# Altium PCB Copy of PSU.PcbDoc
Units mm, origin at the board's own origin, x right, y up, seen from the top; angles counter-clockwise.
Board outline 113.66 x 105.41 mm, 2 copper layers (Top Layer, Bottom Layer); 32 components, 15 nets, 78 pads, 40 vias.
Unrouted connection lines stored in the file: 3.
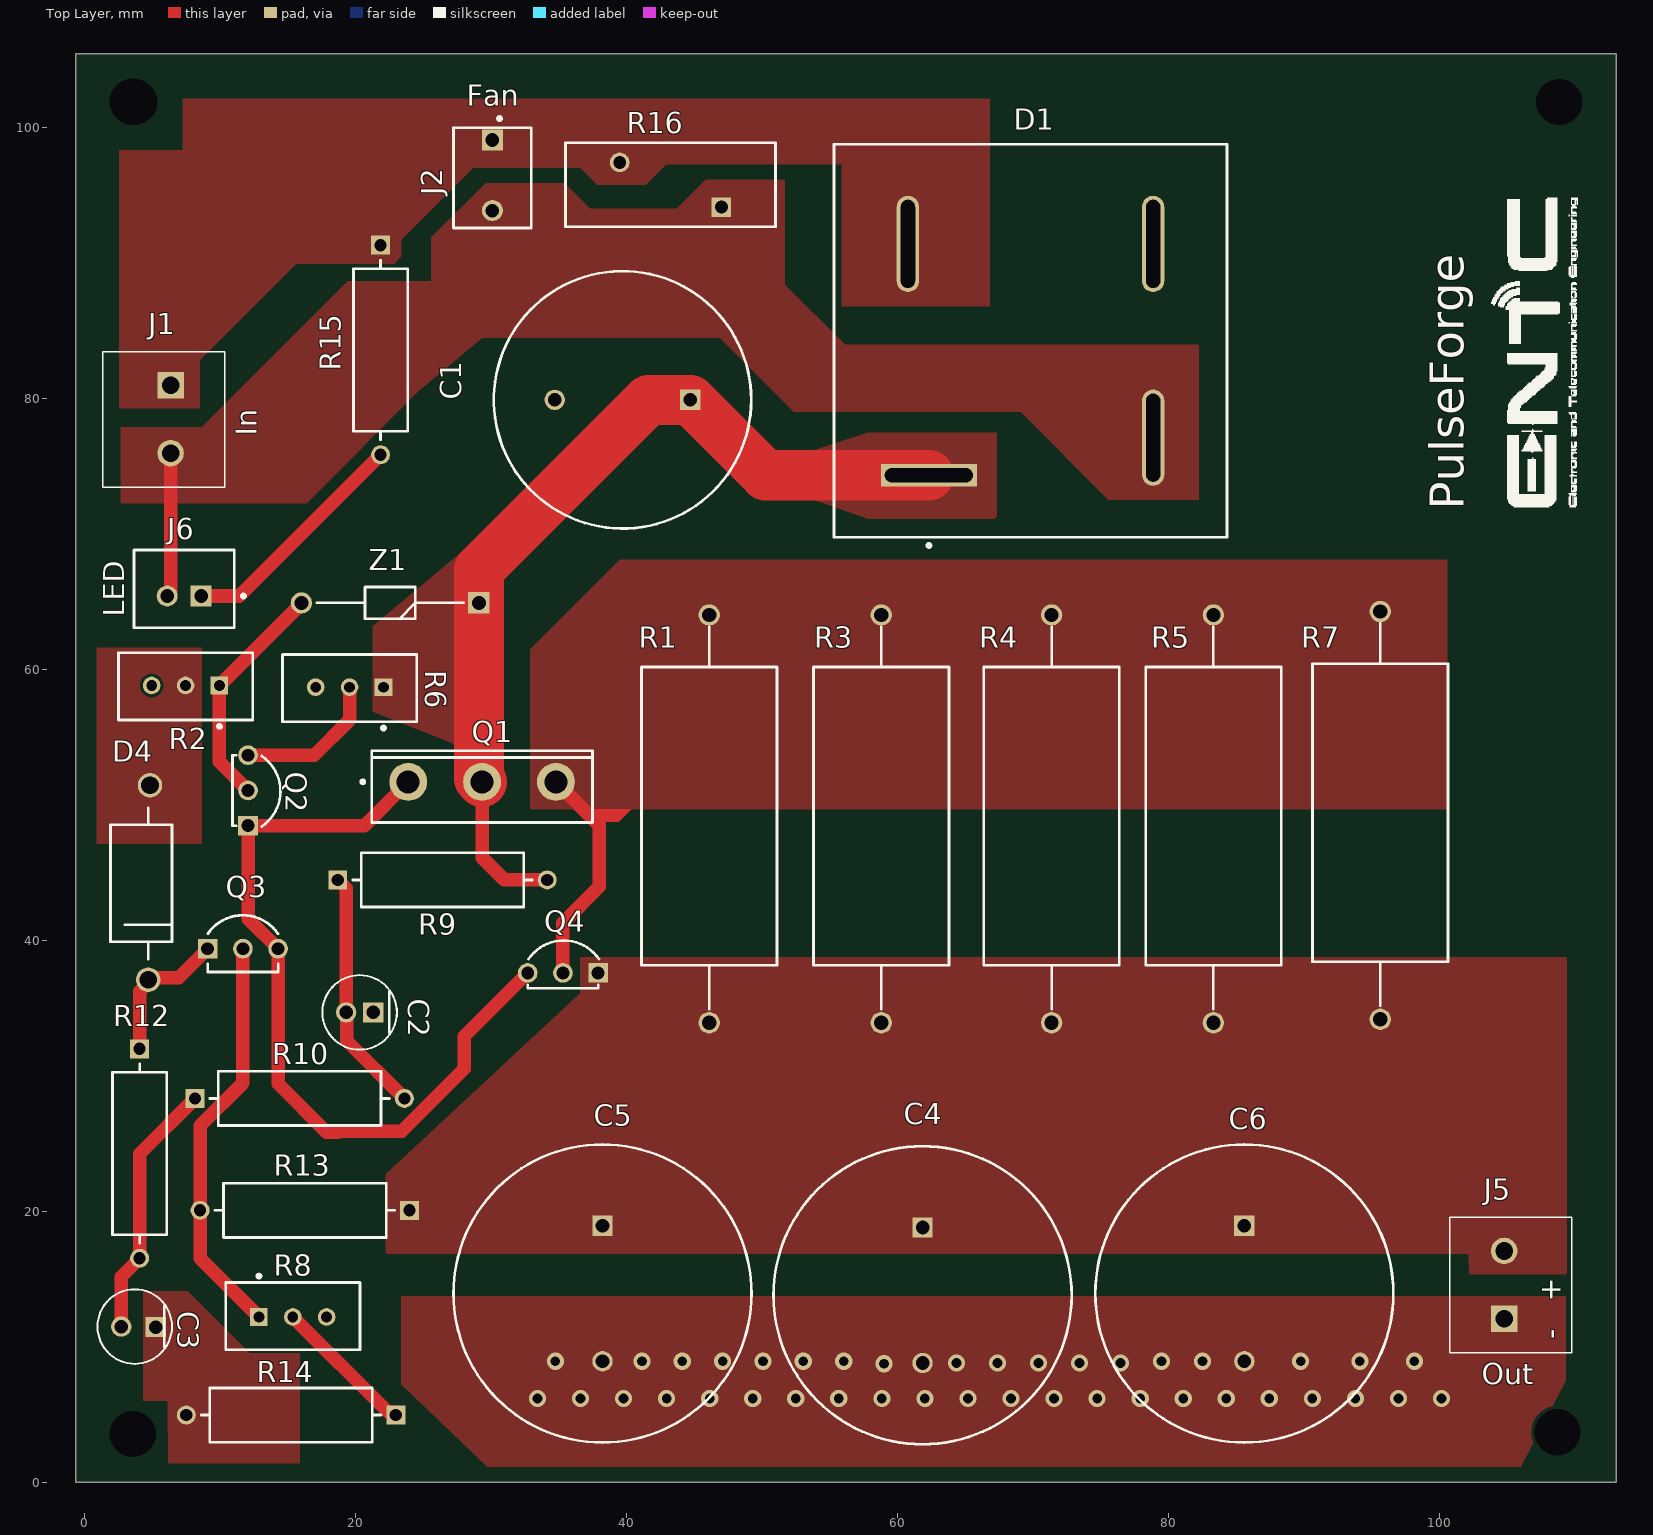
[diagram p0: Top Layer view]
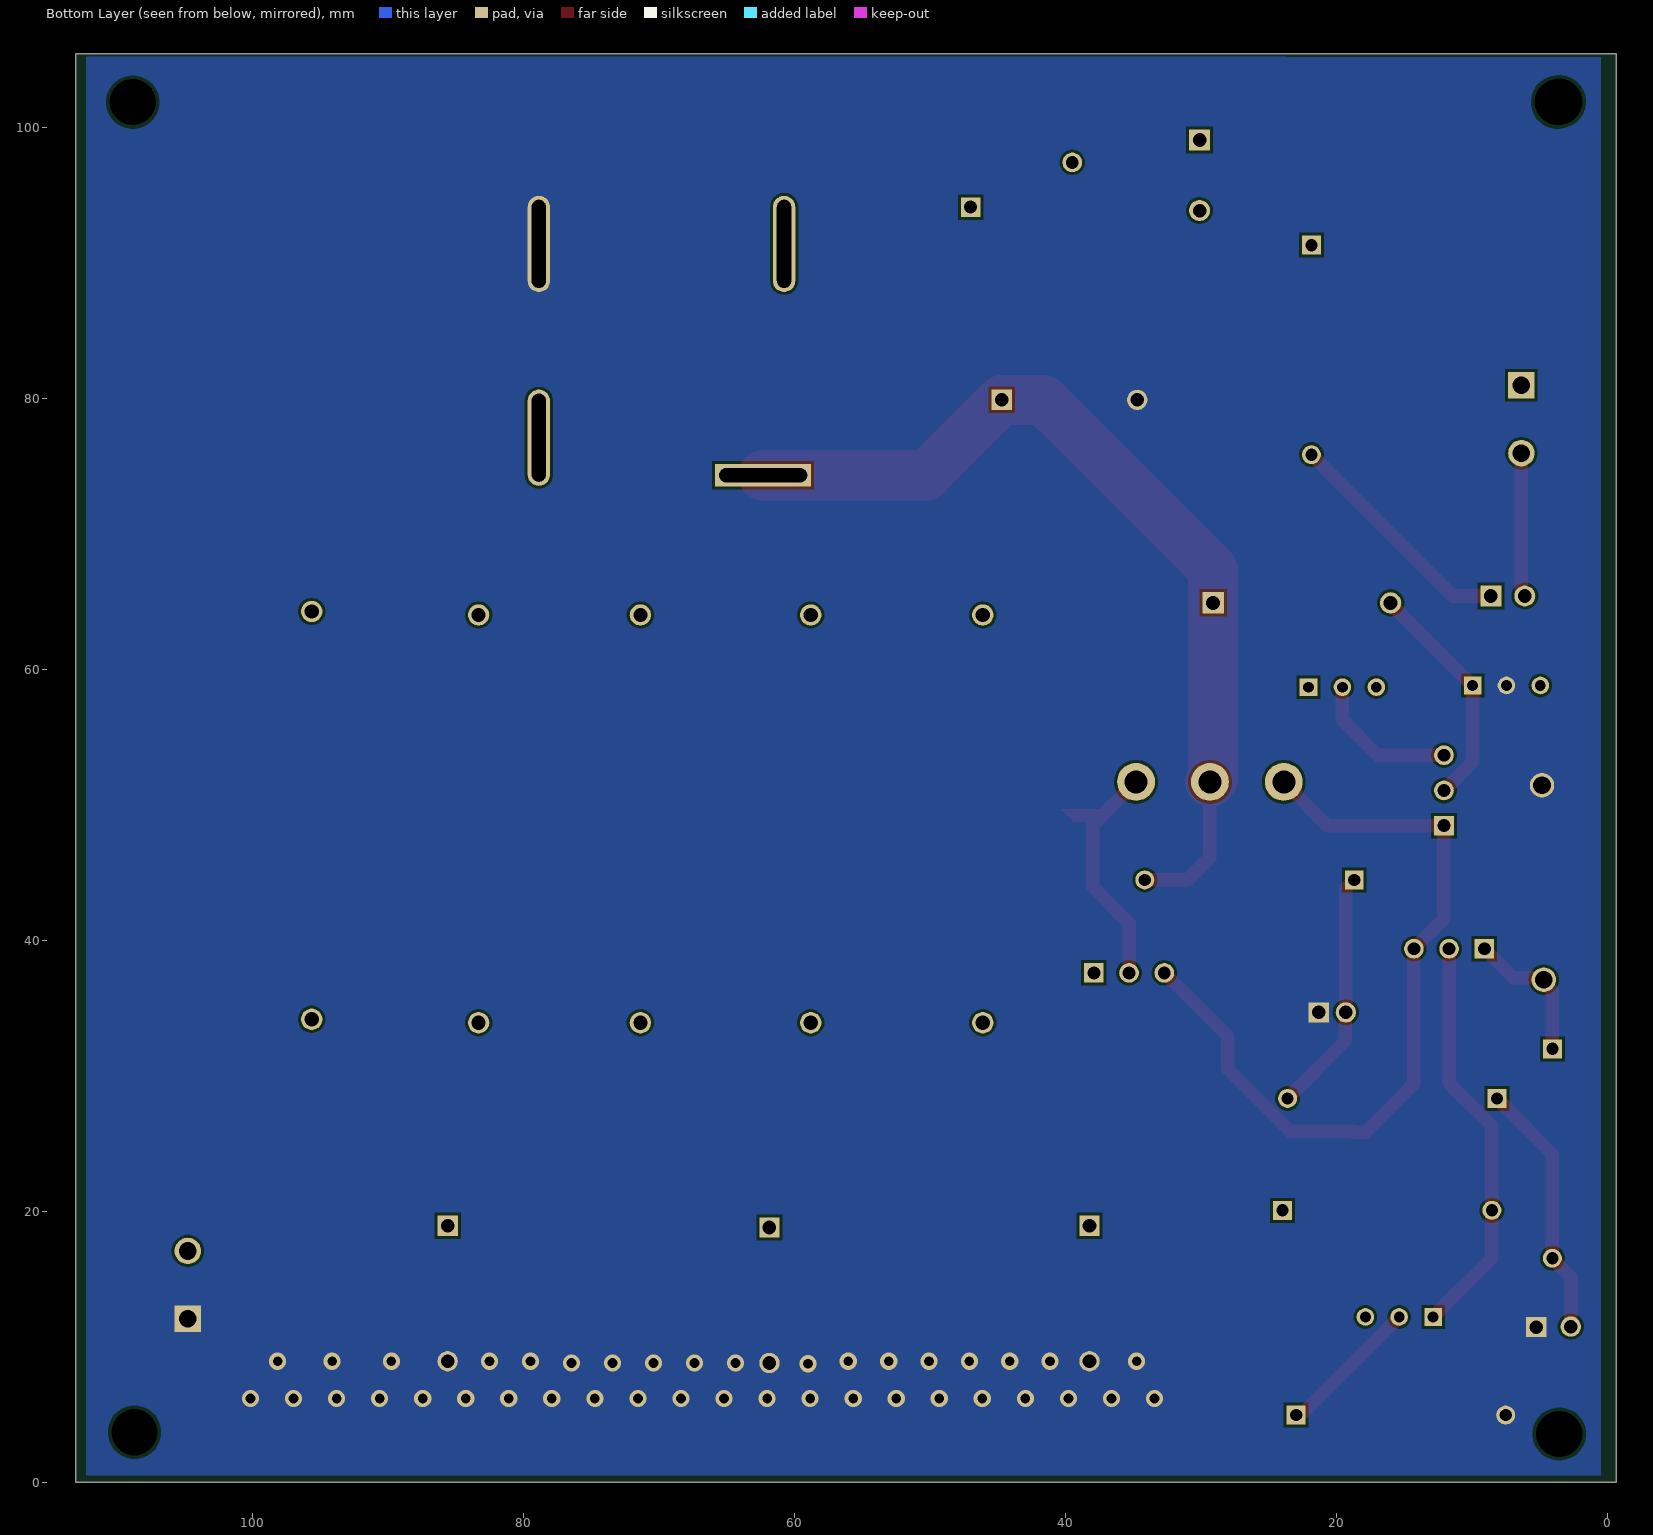
[diagram p1: Bottom Layer view, seen from below]

## Layer stack, top to bottom
Top Solder: solder mask 0.0102, Solder Resist, Dk 3.5
Top Layer: signal copper 0.07
Dielectric 1: dielectric 0.32, FR-4, Dk 4.8
Bottom Layer: signal copper 0.07
Bottom Solder: solder mask 0.0102, Solder Resist, Dk 3.5

## Board outline
-0.635,0 113.03,0 113.03,105.41 -0.635,105.41

## Design rules (kind name [scope] priority, off if disabled: settings)
BoardOutlineClearance [All] p1: gap=0.2 ignorepadtopadclearanceinfootprint=FALSE
Clearance [All] p1: gap=0.203 ignorepadtopadclearanceinfootprint=FALSE except(0.25: Arc-Hole Track-Hole SMDPad-Hole THPad-Hole Via-Hole Fill-Hole Poly-Hole Region-Hole Text-Hole)
ComponentClearance [All] p1: gap=0.127 collisioncheckmode=3 verticalgap=0.127 showdistances=TRUE
DiffPairsRouting [All] p1: maxlimit=0.381 minlimit=0.203 mostfreqgap=0.203 toplayer_minwidth=0.203 toplayer_maxwidth=25.4 toplayer_prefwidth=0.203 bottomlayer_minwidth=0.203 bottomlayer_maxwidth=25.4 bottomlayer_prefwidth=0.203 maxuncoupledlength=12.7
Height [All] p1: minheight=0 maxheight=1816.048 prefheight=12.7
HoleSize [All] p1: absolutevalues=TRUE maxlimit=6.3 minlimit=0.3 maxpercent=80.000 minpercent=20.000
HoleToHoleClearance [All] p1: gap=0.25 allowstackedmicrovias=FALSE
MinimumAnnularRing [All] p1: minimumring=0.076
MinimumSolderMaskSliver [All] p1: minsoldermaskwidth=0
PlaneClearance [All] p1: clearance=0.203
PlaneConnect PlaneConnectPowerPads [InPadClass('PowerPads')] p1: planeconnectstyle=Direct reliefexpansion=0.508 reliefentries=4 reliefconductorwidth=0.254 reliefairgap=0.254
PlaneConnect [All] p2: pad.planeconnectstyle=Relief pad.reliefexpansion=0.3 pad.reliefentries=4 pad.reliefconductorwidth=0.203 pad.reliefairgap=0.203 via.planeconnectstyle=Direct via.reliefexpansion=0.3 via.reliefentries=4 via.reliefconductorwidth=0.127 via.reliefairgap=0.127
PolygonConnect PolygonConnect_12 [All vs IsNamedPolygon('GND_L02_P001')] p1: connectstyle=Direct reliefconductorwidth=0.254 reliefentries=4 polygonreliefangle="90 Angle" airgapwidth=0.254
PolygonConnect PolygonConnect_11 [All vs IsNamedPolygon('GND_L02_P001')] p2: thpad.connectstyle=Relief thpad.reliefconductorwidth=0.254 thpad.reliefentries=4 thpad.polygonreliefangle="90 Angle" thpad.airgapwidth=0.254 smdpad.connectstyle=Relief smdpad.reliefconductorwidth=0.254 smdpad.reliefentries=4 smdpad.polygonreliefangle="90 Angle" smdpad.airgapwidth=0.254 via.connectstyle=Direct via.reliefconductorwidth=0.254 via.reliefentries=4 via.polygonreliefangle="90 Angle" via.airgapwidth=0.254
PolygonConnect PolygonConnect_10 [All vs IsNamedPolygon('GND_L02_P001')] p3: thpad.connectstyle=Direct thpad.reliefconductorwidth=0.254 thpad.reliefentries=4 thpad.polygonreliefangle="90 Angle" thpad.airgapwidth=0.254 smdpad.connectstyle=Direct smdpad.reliefconductorwidth=0.254 smdpad.reliefentries=4 smdpad.polygonreliefangle="90 Angle" smdpad.airgapwidth=0.254 via.connectstyle=Relief via.reliefconductorwidth=0.254 via.reliefentries=4 via.polygonreliefangle="90 Angle" via.airgapwidth=0.254
PolygonConnect PolygonConnect_9 [All vs IsNamedPolygon('GND_L02_P001')] p4: thpad.connectstyle=Direct thpad.reliefconductorwidth=0.254 thpad.reliefentries=4 thpad.polygonreliefangle="90 Angle" thpad.airgapwidth=0.254 smdpad.connectstyle=Direct smdpad.reliefconductorwidth=0.254 smdpad.reliefentries=4 smdpad.polygonreliefangle="90 Angle" smdpad.airgapwidth=0.254 via.connectstyle=Relief via.reliefconductorwidth=0.254 via.reliefentries=4 via.polygonreliefangle="90 Angle" via.airgapwidth=0.254
PolygonConnect PolygonConnect_8 [All vs IsNamedPolygon('GND_L02_P001')] p5: thpad.connectstyle=Direct thpad.reliefconductorwidth=0.254 thpad.reliefentries=4 thpad.polygonreliefangle="90 Angle" thpad.airgapwidth=0.254 smdpad.connectstyle=Direct smdpad.reliefconductorwidth=0.254 smdpad.reliefentries=4 smdpad.polygonreliefangle="90 Angle" smdpad.airgapwidth=0.254 via.connectstyle=Relief via.reliefconductorwidth=0.254 via.reliefentries=4 via.polygonreliefangle="90 Angle" via.airgapwidth=0.254
PolygonConnect PolygonConnect_7 [All vs IsNamedPolygon('NONET_L-01_P-001')] p6: thpad.connectstyle=Direct thpad.reliefconductorwidth=0.254 thpad.reliefentries=4 thpad.polygonreliefangle="90 Angle" thpad.airgapwidth=0.254 smdpad.connectstyle=Direct smdpad.reliefconductorwidth=0.254 smdpad.reliefentries=4 smdpad.polygonreliefangle="90 Angle" smdpad.airgapwidth=0.254 via.connectstyle=Relief via.reliefconductorwidth=0.254 via.reliefentries=4 via.polygonreliefangle="90 Angle" via.airgapwidth=0.254
PolygonConnect PolygonConnect_6 [All vs IsNamedPolygon('NETC1_1_L01_P017')] p7: thpad.connectstyle=Direct thpad.reliefconductorwidth=0.254 thpad.reliefentries=4 thpad.polygonreliefangle="90 Angle" thpad.airgapwidth=0.254 smdpad.connectstyle=Direct smdpad.reliefconductorwidth=0.254 smdpad.reliefentries=4 smdpad.polygonreliefangle="90 Angle" smdpad.airgapwidth=0.254 via.connectstyle=Relief via.reliefconductorwidth=0.254 via.reliefentries=4 via.polygonreliefangle="90 Angle" via.airgapwidth=0.254
PolygonConnect PolygonConnect_5 [All vs IsNamedPolygon('NETD1_2_L01_P003')] p8: thpad.connectstyle=Direct thpad.reliefconductorwidth=0.254 thpad.reliefentries=4 thpad.polygonreliefangle="90 Angle" thpad.airgapwidth=0.254 smdpad.connectstyle=Direct smdpad.reliefconductorwidth=0.254 smdpad.reliefentries=4 smdpad.polygonreliefangle="90 Angle" smdpad.airgapwidth=0.254 via.connectstyle=Relief via.reliefconductorwidth=0.254 via.reliefentries=4 via.polygonreliefangle="90 Angle" via.airgapwidth=0.254
PolygonConnect PolygonConnect_4 [All vs IsNamedPolygon('NETD1_2_L01_P003')] p9: thpad.connectstyle=Direct thpad.reliefconductorwidth=0.254 thpad.reliefentries=4 thpad.polygonreliefangle="90 Angle" thpad.airgapwidth=0.254 smdpad.connectstyle=Direct smdpad.reliefconductorwidth=0.254 smdpad.reliefentries=4 smdpad.polygonreliefangle="90 Angle" smdpad.airgapwidth=0.254 via.connectstyle=Relief via.reliefconductorwidth=0.254 via.reliefentries=4 via.polygonreliefangle="90 Angle" via.airgapwidth=0.254
PolygonConnect PolygonConnect_3 [All vs IsNamedPolygon('NONET_L-01_P-001')] p10: thpad.connectstyle=Direct thpad.reliefconductorwidth=0.254 thpad.reliefentries=4 thpad.polygonreliefangle="90 Angle" thpad.airgapwidth=0.254 smdpad.connectstyle=Direct smdpad.reliefconductorwidth=0.254 smdpad.reliefentries=4 smdpad.polygonreliefangle="90 Angle" smdpad.airgapwidth=0.254 via.connectstyle=Relief via.reliefconductorwidth=0.254 via.reliefentries=4 via.polygonreliefangle="90 Angle" via.airgapwidth=0.254
PolygonConnect PolygonConnect_2 [All vs IsNamedPolygon('NONET_L-01_P-001')] p11: thpad.connectstyle=Direct thpad.reliefconductorwidth=0.254 thpad.reliefentries=4 thpad.polygonreliefangle="90 Angle" thpad.airgapwidth=0.254 smdpad.connectstyle=Relief smdpad.reliefconductorwidth=0.254 smdpad.reliefentries=4 smdpad.polygonreliefangle="90 Angle" smdpad.airgapwidth=0.254 via.connectstyle=Relief via.reliefconductorwidth=0.254 via.reliefentries=4 via.polygonreliefangle="90 Angle" via.airgapwidth=0.254
PolygonConnect PolygonConnect_1 [All vs IsNamedPolygon('33_L01_P002') Or IsNamedPolygon('NETC1_1_L01_P011') Or IsNamedPolygon('NETD1_3_L01_P010') Or IsNamedPolygon('POWER1_L01_P003') Or IsNamedPolygon('POWER_L01_P000') Or IsNamedPolygon('GND_L02_P001')] p12: thpad.connectstyle=Direct thpad.reliefconductorwidth=0.254 thpad.reliefentries=4 thpad.polygonreliefangle="90 Angle" thpad.airgapwidth=0.254 smdpad.connectstyle=Direct smdpad.reliefconductorwidth=0.254 smdpad.reliefentries=4 smdpad.polygonreliefangle="90 Angle" smdpad.airgapwidth=0.254 via.connectstyle=Relief via.reliefconductorwidth=0.254 via.reliefentries=4 via.polygonreliefangle="90 Angle" via.airgapwidth=0.254
PolygonConnect PolygonConnectPowerPads [All vs (InPadClass('PowerPads'))] p13: connectstyle=Direct reliefconductorwidth=0.254 reliefentries=4 polygonreliefangle="90 Angle" airgapwidth=0.254
PolygonConnect [All] p14: thpad.connectstyle=Relief thpad.reliefconductorwidth=0.203 thpad.reliefentries=4 thpad.polygonreliefangle="90 Angle" thpad.airgapwidth=0.203 smdpad.connectstyle=Relief smdpad.reliefconductorwidth=0.203 smdpad.reliefentries=4 smdpad.polygonreliefangle="90 Angle" smdpad.airgapwidth=0.203 via.connectstyle=Direct via.reliefconductorwidth=0.127 via.reliefentries=4 via.polygonreliefangle="90 Angle" via.airgapwidth=0.127
RoutingVias [All] p1: holewidth=0.3 width=0.6 viastyle="Through Hole" minholewidth=0.3 minwidth=0.6 maxholewidth=0.6 maxwidth=6.6
SilkToSilkClearance [All] p1: silktosilkclearance=0
SilkToSolderMaskClearance [IsPad] p1: minsilkscreentomaskgap=0.127 clearancetoexposedcopper=TRUE
SolderMaskExpansion [All] p1: expansion=0.075 istentingtop=FALSE
Width [All] p1: maxlimit=25.4 minlimit=0.203 preferedwidth=0.203 minimp=50.000000 maximp=50.000000 favimp=50.000000
20 further rules are at their usual default settings.

## Components (designator, comment, footprint, x,y, rotation, side; value= is the part's Value field where it differs from the comment)
C1 "ESK478M050AQ3AA" CAPPRD1000W80D2200H3700 44.704,79.883 r180 top
C2 "4.7uF" FP-RAD-TH-D_5_0_5-L_11_1-MFG#1 20.304,34.671 r180 top
C3 "4.7uF" FP-RAD-TH-D_5_0_5-L_11_1-MFG#2 3.702,11.484 r180 top
C4 "ESK478M050AQ3AA" CAPPRD1000W80D2200H3700 61.849,18.796 r270 top
C5 "ESK478M050AQ3AA" CAPPRD1000W80D2200H3700 38.227,18.923 r270 top
C6 "ESK478M050AQ3AA" CAPPRD1000W80D2200H3700 85.598,18.923 r270 top
D1 "Rectifier" FP-160AD-MFG 69.817,84.239 r90 top
D4 "1N5344BRLG" ONSC-SURMETIC40-2-017AA-01 4.699,44.196 r90 top
J1 "In" 1935161 6.35,80.946 r270 top
J2 "Fan" FP-B2B-XH-A_LF_SN-MFG#1 30.099,96.266 r270 top
J5 "Out" 1935161 104.775,12.065 r90 top
J6 "Green light" FP-B2B-XH-A_LF_SN-MFG#2 7.346,65.93 r180 top
Q1 "TIP141G" ONSC-TO-247-3-340L-02 29.337,51.689 r90 top
Q2 "2N5401RL1G" FP-135AR-MFG 11.684,51.054 r180 top
Q3 "2N3904BU" FP-135AR-MFG 11.684,39.751 r90 top
Q4 "BC547" FP-135AR-MFG 35.306,37.211 r270 top
R1 "SQMW5R22J re1" SQMW5R22J-Footprint-1 95.631,34.163 r90 top value=0.22
R2 "1k" FP-67W-MFG 7.453,58.736 r0 top
R3 "SQMW5R22J re1" SQMW5R22J-Footprint-1 46.101,33.909 r90 top value=0.22
R4 "SQMW5R22J re1" SQMW5R22J-Footprint-1 83.312,33.909 r90 top value=0.22
R5 "SQMW5R22J re1" SQMW5R22J-Footprint-1 71.374,33.909 r90 top value=0.22
R6 "402" FP-67W-MFG 19.558,58.609 r0 top
R7 "SQMW5R22J re1" SQMW5R22J-Footprint-1 58.801,33.909 r90 top value=0.22
R8 "1k" FP-67W-MFG 15.367,12.257 r180 top
R9 "100" FP-HVR37-MFG 26.416,44.45 r0 top
R10 "100" FP-HVR37-MFG 15.875,28.321 r0 top
R12 "100" FP-HVR37-MFG 4.064,24.257 r270 top
R13 "10k" FP-HVR37-MFG 16.256,20.066 r180 top
R14 "1k" FP-HVR37-MFG 15.24,4.953 r180 top
R15 "100k" FP-HVR37-MFG 21.844,83.566 r270 top
R16 "ERZV14D471" FP-ERZV14D471-MFG 43.247,95.759 r180 top
Z1 "1N4728A-TAP" DIOAD1310W86L370D235 29.102,64.897 r180 top

## Footprints (in the part's own frame and the unit in brackets; to place one, negate y for a bottom-side part, rotate by r counter-clockwise, add the part's x,y. Pads: shape width x height; smd on the part's side, far side on the other; paste and mask are expansions set on the pad)
1935161 [mm]
  rect 1.95x1.95 hole 1.3: 1(0,0)
  round 1.95 hole 1.3: 2(5,0)
  silkscreen extent -2.5,-5 7.5,4, body extent -2.52,-5 8.05,4, height 12.22
CAPPRD1000W80D2200H3700 [mm]
  rect 1.5x1.5 hole 1: 1(0,0)
  round 1.5 hole 1: 2(10,0)
  silkscreen extent -4.5,-9.5 14.5,9.5, body extent -6.24,-11.25 16.24,11.25, height 38.01
DIOAD1310W86L370D235 [mm]
  rect 1.575x1.575 hole 1.05: 1(0,0)
  round 1.575 hole 1.05: 2(13.1,0)
  silkscreen extent 1.14,-1.18 11.96,1.18, body extent -0.43,-1.29 13.53,1.29, height 2.6
FP-67W-MFG [mm]
  rect 1.3x1.3 hole 0.8 paste-1000 mask+0: 1(2.5,0.065)
  round 1.3 hole 0.8 paste-1000 mask+0: 2(0,0.065) 3(-2.5,0.065)
  silkscreen extent -4.95,-3.07 4.95,2.47, body extent -5.05,-2.58 5.05,2.58, height 0.25
FP-135AR-MFG [mm]
  rect 1.45x1.45 hole 0.95 paste-1000 mask+0: 1(-0.38,2.6)
  round 1.45 hole 0.95 paste-1000 mask+0: 2(-0.38,0) 3(-0.38,-2.6)
  silkscreen extent -2.77,-2.6 0.76,2.66, body extent -2.19,-3.42 2.19,3.42, height 0.25
FP-160AD-MFG [mm]
  rect 1.65x7.1 hole 6.5 slot 1.05 at 0 deg paste-1000 mask+0: 1(-9.92,7.5)
  rrect100% 7.1x1.65 hole 1.05 slot 6.5 at 0 deg paste-1000 mask+0: 2(7.15,9.05) 3(-7.15,-9.05) 4(7.15,-9.05)
  silkscreen extent -15.22,-14.5 14.5,14.5, body extent -14.6,-14.6 14.6,14.6, height 0.25
FP-B2B-XH-A_LF_SN-MFG#1 [mm]
  rect 1.55x1.55 hole 1 paste-1000 mask+0: 1(-2.794,0)
  round 1.55 hole 1 paste-1000 mask+0: 2(2.413,0)
  silkscreen extent -4.5,-2.88 3.7,2.87, body extent -3.8,-2.98 3.8,2.98, height 0.25
FP-B2B-XH-A_LF_SN-MFG#2 [mm]
  rect 1.55x1.55 hole 1 paste-1000 mask+0: 1(-1.25,0.525)
  round 1.55 hole 1 paste-1000 mask+0: 2(1.25,0.525)
  silkscreen extent -4.5,-2.87 3.7,2.88, body extent -3.8,-2.98 3.8,2.98, height 0.25
FP-ERZV14D471-MFG [mm]
  rect 1.45x1.45 hole 0.95 paste-1000 mask+0: 1(-3.75,1.65)
  round 1.45 hole 0.95 paste-1000 mask+0: 2(3.75,-1.65)
  silkscreen extent -7.75,-3.1 7.75,3.1, body extent -7.85,-3.2 7.85,3.2, height 0.25
FP-HVR37-MFG [mm]
  rect 1.4x1.4 hole 0.9 paste-1000 mask+0: 1(-7.73,0)
  round 1.4 hole 0.9 paste-1000 mask+0: 2(7.73,0)
  silkscreen extent -6.63,-2 6.63,2, body extent -8.53,-2.1 8.53,2.1, height 0.25
FP-RAD-TH-D_5_0_5-L_11_1-MFG#1 [mm]
  rect 1.5x1.5 hole 1 paste-1000 mask+0: 1(-1,0)
  round 1.5 hole 1 paste-1000 mask+0: 2(1,0)
  silkscreen extent -2.75,-2.75 2.75,2.75, body extent -2.85,-2.85 2.85,2.85, height 0.25
FP-RAD-TH-D_5_0_5-L_11_1-MFG#2 [mm]
  rect 1.5x1.5 hole 1 paste-1000 mask+0: 1(-1.548,0.034)
  round 1.5 hole 1 paste-1000 mask+0: 2(1,0)
  silkscreen extent -2.75,-2.75 2.75,2.75, body extent -2.85,-2.85 2.85,2.85, height 0.25
ONSC-SURMETIC40-2-017AA-01 [mm] "AXIAL, 2-Leads, Diameter 3.49mm"
  round 1.8 hole 1.3: 1(-7.112,0) 2(7.239,-0.127)
  silkscreen extent -5.59,-1.74 5.59,2.79, body extent -8.17,-2.03 8.17,2.92, height 3.49
ONSC-TO-247-3-340L-02 [mm] "FM, 3-Leads, Body 16.3x5.3mm, Pitch 5.45mm"
  round 2.8 hole 1.7: 1(0,5.45) 2(0,0) 3(0,-5.45)
  silkscreen extent -3,-8.15 2.3,8.92, body extent -3,-8.15 2.3,8.15, height 25.58
SQMW5R22J-Footprint-1 [mm]
  round 1.575 hole 1.05: 1(0,0) 2(30.099,0)
  silkscreen extent 1.02,-5 29.21,5, body extent 3.94,-4.73 26.04,6.26, height 0.25

## Part data
C1 C4 C5 C6: "Capacitor Polarised", Manufacturer_Name=KEMET, Mouser Part Number=80-ESK478M050AQ3AA, Datasheet Link=https://content.kemet.com/datasheets/KEM_A4004_ESK.pdf, Height=37mm, Manufacturer_Part_Number=ESK478M050AQ3AA, Mouser Price/Stock=https://www.mouser.co.uk/ProductDetail/KEMET/ESK478M050AQ3AA?qs=gt1LBUVyoHl7SM9dsUCJjA%3D%3D
C2 C3: library part CMP-05427-000256-1, "Aluminum Electrolytic Capacitors (Radial Lead Type) AEC-Q200 Qualified 4.7uF ±20% 50V", Case/Package=Radial, ESR (Equivalent Series Resistance)=1.3R, Max Operating Temperature=105°C, Min Operating Temperature=-55°C, Package Quantity=2000, Ratings=AEC-Q200, Ripple Current=95mA, Tolerance=20%, Voltage Rating=50V, Capacitance=4.7uF, Contact Plating=Tin, Diameter=5mm, Features="General Purpose", Height=11mm, Height - Seated (Max)=0.472inch, Impedance=1.3R, Lead Diameter=0.5mm, Lead Pitch=2.5mm, Length=11mm, Life (Hours)=1000Hour, Mount="Through Hole", Packaging="Ammo Pack", Polarity=Polar, Radiation Hardening=No, RoHS Compliant=Yes, Series=FC, Termination=Radial, Voltage Rating (DC)=50V
D1: library part CMP-00278-23026262-1, "GBPC3506 GBPC3506 Series 35 A 600 V Bridge Rectifier Quick Connect - GBPC-4", Average Rectified Current=35A, Capacitance=180pF, Case/Package=Module, Forward Voltage=1.1V, Manufacturer Lifecycle Status="ACTIVE, NOT REC", Max Forward Surge Current (Ifsm)=400A, Max Operating Temperature=150°C, Max Repetitive Reverse Voltage (Vrrm)=600V, Max Reverse Leakage Current=5µA, Min Operating Temperature=-55°C, Power Dissipation=83.3W, Current Rating=35A, Element Configuration=Single, Forward Current=35A, Height=11.23mm, Lead Free="Lead Free", Length=29mm, Lifecycle Status=NRND, Max Surge Current=400A, Mount=Screw, NexarPartId=23026262, Number of Elements=1, Number of Pins=4, Output Current=35A, Packaging=Bulk, Peak Non-Repetitive Surge Current=400A, Peak Reverse Current=5µA, Radiation Hardening=No, REACH SVHC="No SVHC", RoHS=Compliant, Schedule B="8541100080, 8541100080", Voltage Rating (DC)=600V, Weight=16.74g, Width=29mm
D4: library part CMP-1060-01306-1, "5 W Zener Voltage Regulator, 2-Pin Surmetic(TM) 40, Pb-Free, Tape and Reel", Manufacturer="On Semiconductor", ComponentLink1Description="Manufacturer URL", ComponentLink1URL=http://www.onsemi.com/, ComponentLink2Description=Datasheet, ComponentLink2URL=http://www.onsemi.cn/pub_link/Collateral/1N5333B-D.PDF, ComponentLink3Description="Package Specification", ComponentLink3URL=http://www.onsemi.cn/pub_link/Collateral/017AA.PDF, DatasheetVersion="Rev. 14", Mounting Technology="Through Hole", P Max (W)=5, PackageDescription="2-Pin, Axial Lead, Diameter 3.49 mm", PackageReference=SURMETIC40-2-017AA-01, PackageVersion="Rev. O, 09/2005", Packing="Tape and Reel", PartNumber=1N5344BRLG, RoHS=Pb-Free, VZ Typ (V)=8.2
J1 J5: library part 1935161, "Connector", Manufacturer_Name="Phoenix Contact", Mouser Part Number=651-1935161, Arrow Part Number=1935161, Arrow Price/Stock=https://www.arrow.com/en/products/1935161/phoenix-contact?region=nac, Datasheet Link=https://datasheet.datasheetarchive.com/originals/distributors/SFDatasheet-2/sf-00057459.pdf, Height=11.55mm, Manufacturer_Part_Number=1935161, Mouser Price/Stock=https://www.mouser.co.uk/ProductDetail/Phoenix-Contact/1935161?qs=W3wJikR1%252BS6eKzfFl8Rbew%3D%3D
J2 J6: library part CMP-2000-05888-3, "CONN HEADER VERT 2POS 2.5MM", Color=Natural, Contact Resistance=20mR, Current Rating=3A, Housing Color=White, Insulation Resistance=1GR, Max Operating Temperature=85°C, Max Voltage Rating (AC)=250V, Min Operating Temperature=-25°C, Connector Type="Male Pin", Contact Material=Brass, Contact Plating=Tin, Contact Type="Male Pin", Depth=5.75mm, Fastening Type=Detent, Housing Material=Polyamide, Lead Free="Lead Free", Lead Pitch=2.5mm, Length=7.4mm, Max Current Rating=3A, Max Voltage Rating (DC)=250V, Mount="Through Hole", Number of Contacts=2, Number of Positions=2, Number of Rows=1, Orientation=Straight, Packaging=Bulk, Pitch=2.5mm, REACH SVHC="No SVHC", Series=XH, Termination=Solder, Voltage Rating=250V, Voltage Rating (AC)=250V, Wire/Cable Gauge=22AWG
Q1: library part CMP-1047-00196-1, "Darlington Complementary Silicon Power Transistor, 3-Pin TO-247, Pb-Free, Tube", Manufacturer="On Semiconductor", ComponentLink1Description="Manufacturer URL", ComponentLink1URL=http://www.onsemi.com/, ComponentLink2Description=Datasheet, ComponentLink2URL=http://www.onsemi.cn/pub_link/Collateral/TIP140-D.PDF, ComponentLink3Description="Package Specification", ComponentLink3URL=http://www.onsemi.cn/pub_link/Collateral/340L-02.PDF, DatasheetVersion="Rev. 6", IC Continuous (A)=10, Mounting Technology="Through Hole", PackageDescription="3-Pin Flange Mount, Vertical Straight Lead, Body 16.005 x 5 mm, Pitch 5.45 mm", PackageReference=TO-247-3-340L-02, PackageVersion="Rev. F, 10/2011", Packing=Tube, PartNumber=TIP141G, Polarity=NPN, RoHS=TRUE
Q2: library part CMP-00278-84324598-1, "BC560CTA Small Signal Bipolar Transistor, 0.1A I(C), 45V V(BR)CEO, 1-Element, PNP, Silicon, TO-92", Case/Package=TO-92-3, Collector Base Voltage (VCBO)=-50V, Collector Emitter Breakdown Voltage=45V, Collector Emitter Saturation Voltage=-250mV, Emitter Base Voltage (VEBO)=-5V, Frequency=150MHz, Manufacturer Lifecycle Status=OBSOLETE, Max Collector Current=100mA, Max Frequency=10MHz, Max Operating Temperature=150°C, Max Power Dissipation=500mW, Min Operating Temperature=-65°C, Collector Emitter Voltage (VCEO)=45V, Contact Plating=Tin, Element Configuration=Single, Gain Bandwidth Product=150MHz, Height=5.33mm, hFE Min=110, Lead Free="Lead Free", Length=5.2mm, Lifecycle Status=Obsolete, Max Breakdown Voltage=45V, Mount="Through Hole", NexarPartId=84324598, Number of Elements=1, Number of Pins=3, Polarity=PNP, Power Dissipation=500mW, Radiation Hardening=No, REACH SVHC="No SVHC", RoHS=Compliant, Transition Frequency=150MHz, Weight=240mg, Width=4.19mm
Q3 Q4: library part CMP-00278-84408872-1, "2N4401TFR Small Signal Bipolar Transistor, 0.6A I(C), 40V V(BR)CEO, 1-Element, NPN, Silicon, TO-92", Case/Package=TO-92, Collector Base Voltage (VCBO)=60V, Collector Emitter Breakdown Voltage=40V, Collector Emitter Saturation Voltage=750mV, Current Rating=600mA, Emitter Base Voltage (VEBO)=6V, Frequency=250MHz, Manufacturer Lifecycle Status=ACTIVE, Max Operating Temperature=150°C, Max Power Dissipation=625mW, Min Operating Temperature=-55°C, Collector Emitter Voltage (VCEO)=40V, Contact Plating=Tin, Element Configuration=Single, Gain Bandwidth Product=250MHz, Height=6.35mm, hFE Min=100, Lead Free="Lead Free", Length=6.35mm, Lifecycle Status=Production, Max Breakdown Voltage=40V, Max Collector Current=600mA, Max Frequency=250MHz, Mount="Through Hole", NexarPartId=84408872, Number of Elements=1, Number of Pins=3, Packaging="Cut Tape", Polarity=NPN, Power Dissipation=625mW, Radiation Hardening=No, REACH SVHC="No SVHC", RoHS=Compliant, Schedule B="8541210080, 8541210080", Transition Frequency=250MHz, Voltage Rating (DC)=40V, Weight=240mg, Width=6.35mm
R1 R3 R4 R5 R7: library part CMP-009-00182-1, "Fixed Resistor, Wire Wound, 5W, 0.22ohm, 5% +/-Tol, 300ppm/Cel, Through Hole Mount, 5135", Case/Package=5135, Max Operating Temperature=250°C, Min Operating Temperature=-55°C, Power=5W, Tolerance=5%, Mounting Technology="Through Hole", Pins=2, RoHS Compliant=Yes
R2 R6 R8: library part CMP-50449-000002-1, "TRIMMER 100K OHM 0.5W PC PIN TOP", Max Operating Temperature=125°C, Max Power Dissipation=500mW, Min Operating Temperature=-55°C, Package Quantity=100, Resistance=100kR, Resistance Tolerance=10%, Resistor Type=Cermet, Temperature Coefficient=100ppm/°C, Voltage Rating=200V, Depth=4.95mm, Height=0.409inch, Lead Free="Lead Free", Length=9.53mm, Military Standard=Not, Mount="Through Hole", Number of Turns=20, Packaging=Bulk, Power Rating=500mW, Radiation Hardening=No, REACH SVHC="No SVHC", RoHS Compliant=Yes, Series=67, Technology=CERMET, Termination=Pin, Tolerance=10%, Type=Potentiometer, Voltage Rating (DC)=200V, Weight=1.1g
R9 R10 R12 R13 R14 R15: library part CMP-00030-42845042-1, "HVR3700001004FR500 Fixed Resistor, Metal Film, 0.5W, 1000000ohm, 3500V, 1% +/-Tol, 200ppm/Cel, Through Hole Mount", Case/Package=Axial, Max Operating Temperature=155°C, Max Power Dissipation=500mW, Min Operating Temperature=-55°C, Resistance=1MΩ, Temperature Coefficient=200ppm/°C, Tolerance=1%, Voltage Rating=3.5kV, Composition="Metal Film", Features="Flame Retardant Coating", Height=4mm, Lead Diameter=780µm, Lead Free="Lead Free", Length=10.0076mm, NexarPartId=42845042, Number of Pins=2, Number of Terminations=2, Packaging="Cut Tape (CT)", Power Rating=500mW, Radiation Hardening=No, REACH SVHC=Unknown, RoHS=Compliant, Schedule B="8533210090, 8533210090", Termination=Axial, Voltage Rating (DC)=3.5kV
R16: library part CMP-00287-18970264-1, "ERZV14D471 V Series 385 VDC 300 V RMS 470 V 6 kA Through Hole Transient/Surge Absorber", Capacitance=400pF, Case/Package=Metal, Clamping Current=50A, Clamping Voltage=775V, Max Operating Temperature=85°C, Max Supply Voltage=300V, Max Surge Current=6kA, Max Varistor Voltage=517V, Max Voltage Rating (DC)=385V, Min Operating Temperature=-40°C, Min Varistor Voltage=423V, Power Rating=600mW, Varistor Voltage=470V, Voltage Tolerance=10%, Depth=6.2mm, Diameter=15.5mm, Energy=175J, ESD Protection=No, Height=18.5mm, Lead Free="Lead Free", Lead Pitch=7.5mm, Lead/Base Style=Radial, Lifecycle Status=Production, Material=Zinc, Max Voltage Rating (AC)=300V, Mount="Radial, Through Hole", NexarPartId=18970264, Number of Circuits=1, REACH SVHC="No SVHC", RoHS=Compliant, Schedule B="8533400080, 8533400080", Termination=Radial, Thickness=6.2mm, Voltage=470V, Voltage Rating=300V, Voltage Rating (AC)=300V, Voltage Rating (DC)=385V, Width=7.5mm
Z1: "Zener Diode", Manufacturer_Name=Vishay, Mouser Part Number=78-1N4728A-TAP, Arrow Part Number=1N4728A-TAP, Arrow Price/Stock=https://www.arrow.com/en/products/1n4728a-tap/vishay?region=nac, Datasheet Link=http://www.vishay.com/docs/85816/1n4728a.pdf, Manufacturer_Part_Number=1N4728A-TAP, Mouser Price/Stock=https://www.mouser.co.uk/ProductDetail/Vishay-Semiconductors/1N4728A-TAP?qs=jOv7F9L7VbhWbv%2Fx6WHg%2FA%3D%3D

## Free pads (board coordinates)
  round 0 hole 3.4: 1(3.556,3.556) 1(3.556,101.884) 1(3.683,101.854) 1(108.712,3.683) 1(108.839,101.854)

## Via types
v1: diameter 1.27, hole 0.711, Top Layer to Bottom Layer, 40 vias

## Nets (pads, with @x,y where several pads share a name; then routed paths per layer and width w, separated by ;. In a path a pad name is that pad's centre, name@x,y a point inside that pad or via, vN(x,y) a via of type N, cw(c..) or ccw(c..) an arc to the next point about the centre after c; other vN are vias at no path point)
33: Q1.3 Q4.2 R1.2 R3.2 R4.2 R5.2 R7.2 | length 16.5
  Top Layer w1: Q1.3 37.973,48.503 37.973,43.942 35.306,41.275 Q4.2
GND: C1.2 C2.1 C3.1 C4.2 C5.2 C6.2 D1.4 D4.2 J5.1 R2.2 R14.2
  other v1: 33.425,6.175 36.602,6.175 39.78,6.175 42.957,6.175 46.135,6.175 49.312,6.175 52.489,6.175 55.667,6.175 58.844,6.175 62.021,6.175 65.199,6.175 68.376,6.175 71.554,6.175 74.731,6.175 77.908,6.175 81.086,6.175 84.263,6.175 87.44,6.175 90.618,6.175 93.795,6.175 96.973,6.175 100.15,6.175 59,8.746 64.35,8.796 67.376,8.796 70.402,8.796 73.428,8.796 76.453,8.796 34.75,8.923 41.137,8.923 44.115,8.923 47.092,8.923 50.07,8.923 53.047,8.923 56.025,8.923 79.479,8.923 82.505,8.923 89.75,8.923 94.125,8.923 98.15,8.923
NetC1_1: C1.1 D1.1 Q1.2 R6.1 R9.2 Z1.1 | length 67.8
  Top Layer w1: R6.1 R6.1@22.208,58.824 ; Q1.2 29.337,46.101 30.988,44.45 R9.2
  Top Layer w3.7: Q1.2 29.102,51.924 Z1.1 29.102,67.346 41.639,79.883 C1.1 50.268,74.319 D1.1
NetC2_2: C2.2 R9.1 R10.2 | length 18.2
  Top Layer w1: R9.1 19.304,43.832 C2.2 19.342,34.633 19.342,32.584 R10.2
NetC3_2: C3.2 R10.1 R12.2 | length 19.1
  Top Layer w1: C3.2 2.702,15.165 R12.2 4.064,24.24 R10.1
NetD1_2: D1.2 J1.1 J2.1 R15.1 R16.2
NetD1_3: D1.3 J1.2 J2.2 J6.2 R16.1 | length 10.6
  Top Layer w1: J6.2 6.096,65.554 6.35,65.808 J1.2
NetD4_1: D4.1 Q3.1 R12.1 | length 10.7
  Top Layer w1: R12.1 4.064,36.233 4.699,36.868 D4.1 4.852,37.237 6.95,37.237 Q3.1
NetJ6_1: J6.1 R15.2 | length 17.6
  Top Layer w1: J6.1 11.413,65.405 R15.2
NetQ1_1: Q1.1 Q2.1 Q3.3 Q4.3 | length 59.3
  Top Layer w1: Q1.1 20.652,48.454 Q2.1 12.064,41.591 Q3.3 14.284,29.404 17.874,25.814 18.702,25.814 18.796,25.908 23.417,25.908 28.019,30.509 28.019,32.904 Q4.3
NetQ2_2: Q2.2 R2.1 Z1.2 | length 17.2
  Top Layer w1: Q2.2 9.953,53.165 R2.1 16.002,64.85 Z1.2
NetQ2_3: Q2.3 R6.2 | length 11
  Top Layer w1: Q2.3 16.951,53.654 19.558,56.261 R6.2
NetQ3_2: Q3.2 R8.1 R13.2 | length 30.3
  Top Layer w1: Q3.2 11.684,29.466 8.526,26.308 R13.2 8.526,16.533 R8.1
NetR8_2: R8.2 R14.1 | length 10.6
  Top Layer w1: R8.2 22.406,5.153 22.77,5.153 R14.1
POWER: C4.1 C5.1 C6.1 J5.2 Q4.1 R1.1 R3.1 R4.1 R5.1 R7.1 R13.1
pads on no net: R2.3 R6.3 R8.3

## Polygon pours and split planes (outlines as drawn)
POWER on Top Layer "POWER_L01_P000" (solid, pour order 0): 36.576,36.068 22.225,22.733 22.225,16.85 102.161,16.859 102.187,15.35 109.4,15.35 109.4,16.85 109.4,38.735 98.806,38.735 37.084,38.735 36.576,38.735
33 on Top Layer "33_L01_P002" (solid, pour order 2): 32.893,49.53 33.02,49.657 100.584,49.657 100.584,68.072 39.497,68.072 32.893,61.468
GND on Top Layer "NONET_L-01_P-001" (solid, pour order 14): 8.636,61.595 8.636,47.117 0.889,47.117 0.889,61.595
NetD1_2 on Top Layer "NETD1_2_L01_P003" (solid, pour order 3): 2.54,79.248 8.509,79.248 8.509,82.804 15.621,89.916 22.809,89.908 23.368,90.467 23.368,91.694 28.702,97.028 36.576,97.028 37.846,95.758 41.402,95.758 42.926,97.282 55.88,97.282 55.88,86.804 66.802,86.804 66.802,90.932 66.802,102.108 7.239,102.108 7.239,98.298 2.54,98.298
NetD1_3 on Top Layer "NETD1_3_L01_P010" (solid, pour order 10): 82.238,72.517 75.565,72.517 69.088,78.994 52.324,78.994 46.863,84.455 29.337,84.455 24.638,80.518 16.383,72.263 2.667,72.263 2.667,77.851 8.636,77.851 19.431,88.646 25.587,88.646 25.587,91.881 29.591,95.885 35.433,95.885 37.338,93.98 43.688,93.98 45.847,96.139 46.609,96.139 51.689,96.139 51.689,88.392 56.134,83.947 65.786,83.947 82.238,83.947
GND on Top Layer "NONET_L-01_P-001" (solid, pour order 13): 109.325,7.5 109.325,13.716 23.368,13.716 23.368,7.239 29.718,1.143 29.972,1.143 106,1.143
GND on Top Layer "NONET_L-01_P-001" (solid, pour order 15): 4.315,14.097 4.315,6.025 6.139,6.025 6.159,1.397 15.875,1.397 15.875,9.525 12.192,9.525 7.62,14.097
NetC1_1 on Top Layer "NETC1_1_L01_P017" (solid, pour order 17): 21.284,63.175 21.284,56.848 27.347,54.463 27.875,68.7
NetC1_1 on Top Layer "NETC1_1_L01_P011" (solid, pour order 11): 53.6,72.6 53.6,76.075 57.766,77.449 67.31,77.44 67.31,71.247 67.183,71.12 57.785,71.12
GND on Bottom Layer "GND_L02_P001" (solid, pour order 1): 0.508,105.153 0.508,0.508 112.268,0.508 112.268,105.408

## Other copper
Top Layer:
  region net 33: 39.975,49.3 39.425,48.75 38.2,48.75 37.275,49.675 40.35,49.675

## Silkscreen, mask and mechanical layers (free items; w line width, h text height)
Top Overlay:
  drawing of 42 lines, arcs and shapes, not listed
  text "Fan" at 28.194,101.6 h1.52
  text "In" at 12.7,77.216 h1.52 r90
  text "PulseForge" at 101.783,71.755 h2.5 r90
  text "LED" at 2.921,63.881 h1.52 r90
  text "-   +" at 108.966,10.541 h1.52 r90
  text "Out" at 103.124,7.239 h1.52
Mechanical 1:
  lines w1.2: 0,0 0,105.41 112.776,105.41 112.776,-0.001 112.775,0 0,0